# Allegro board IRCAM-27.brd
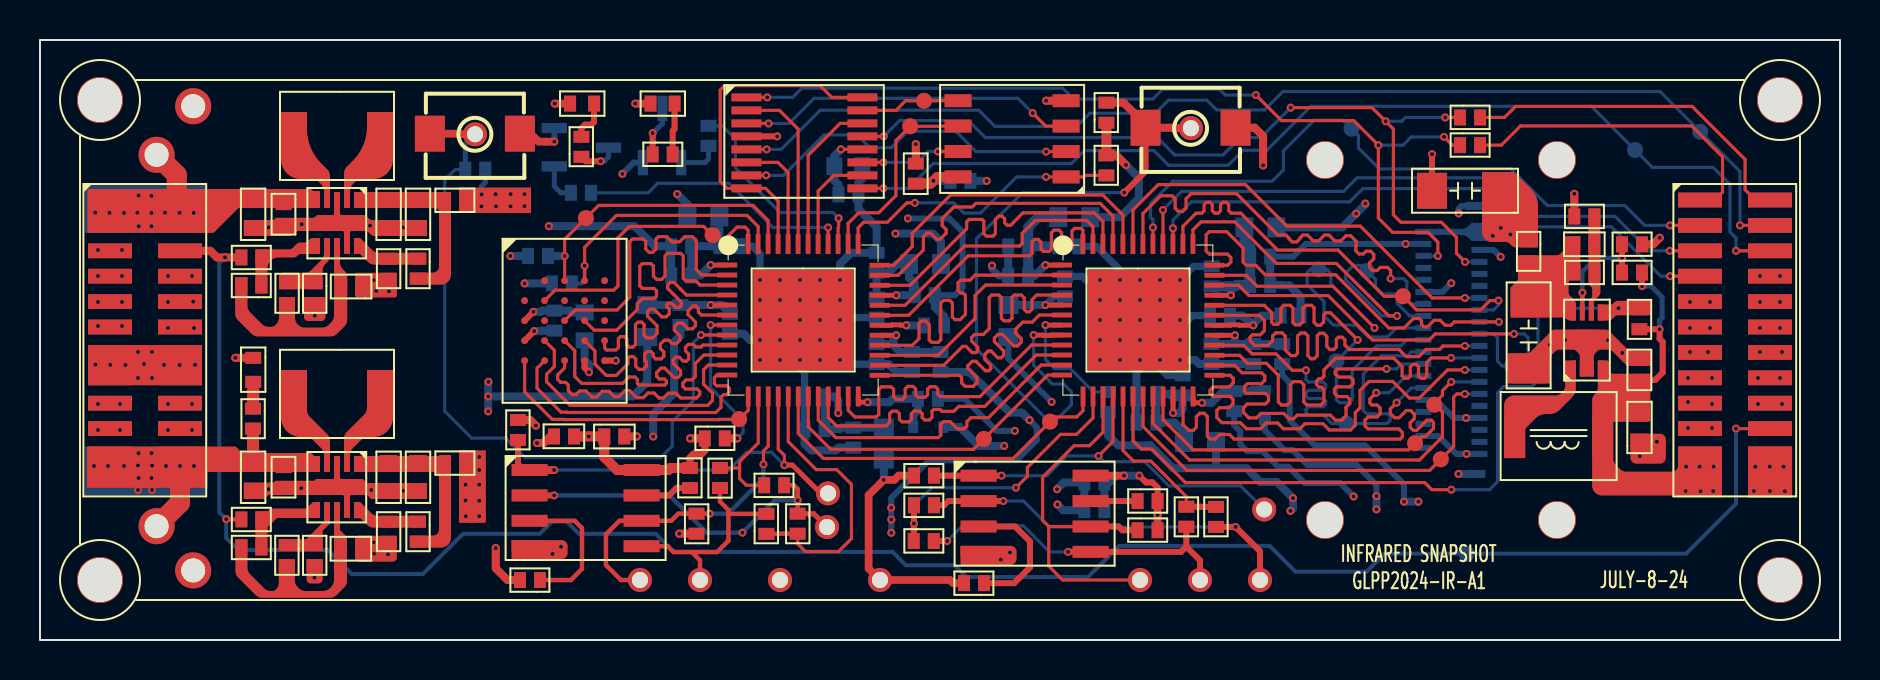
[diagram p0: board, top side]
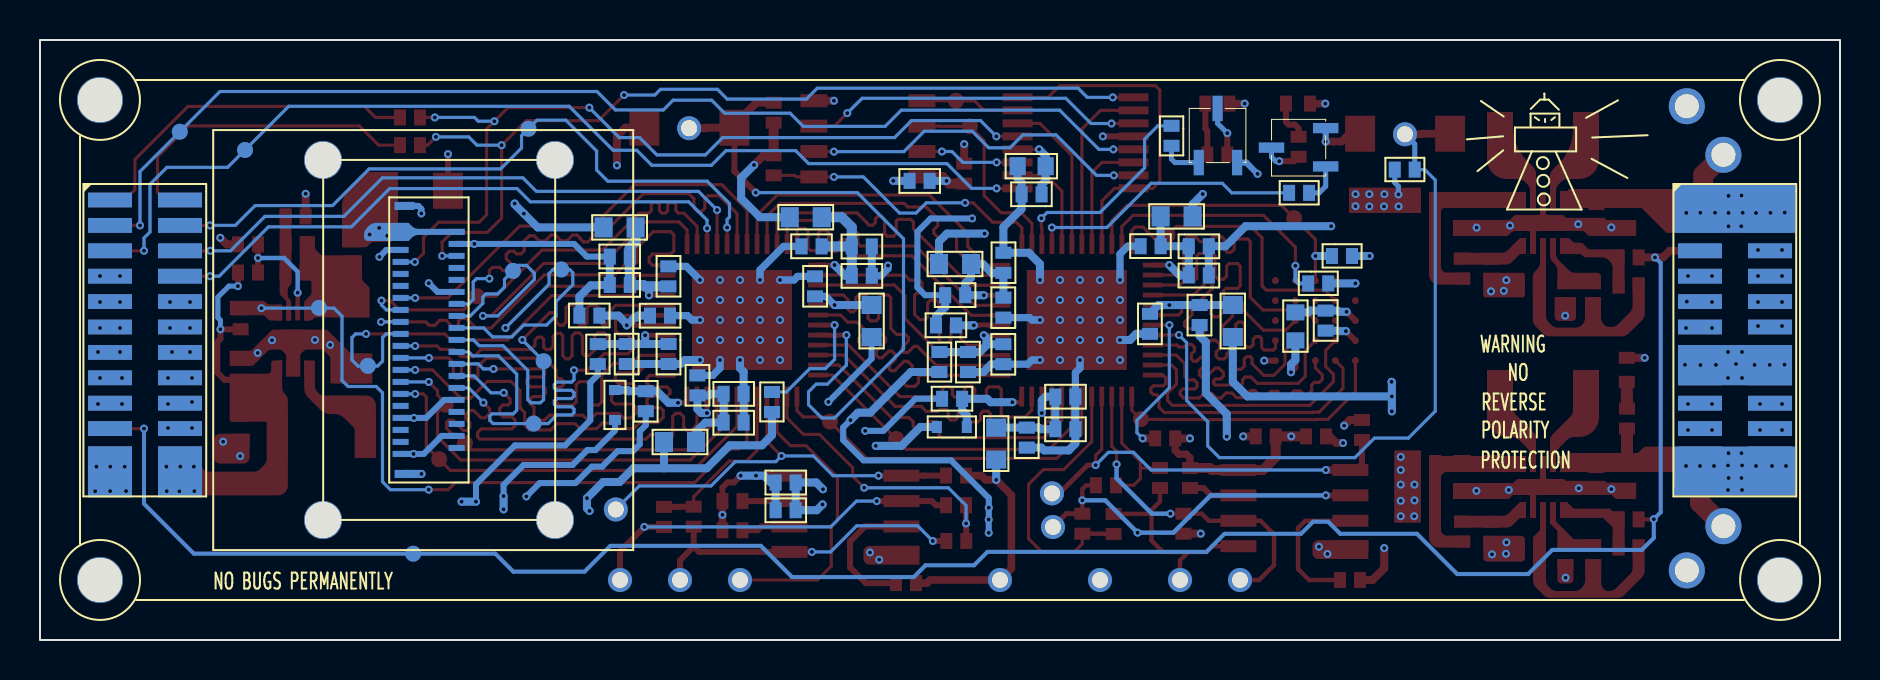
[diagram p1: board, bottom side, seen from below]

Outline 90 x 30 mm; copper layers: TOP, GND, VCC, BOTTOM. Coordinates in mm from the lower left corner of the outline.
Outline path: rectangle 0,0 90,30

## Design rules (mm)
constraint set DEFAULT: min track width 0.157
net group N101011: nets N101011 N101135
net group MG1: nets PSRAM_ADQ0 PSRAM_ADQ1 PSRAM_ADQ2 PSRAM_ADQ3 PSRAM_ADQ4 PSRAM_ADQ5 PSRAM_ADQ6 PSRAM_ADQ7 PSRAM_CLK PSRAM_DQS
net group MG2: nets IR_D0 IR_D1 IR_D2 IR_D3 IR_D4 IR_D5 IR_D6 IR_D7 IR_D8 IR_D9 IR_D10 IR_D11 IR_D12 IR_D13 IR_HSYNC IR_PCLK IR_VSYNC
net group MG3: nets RAM_ADQ0 RAM_ADQ1 RAM_ADQ2 RAM_ADQ3 RAM_ADQ4 RAM_ADQ5 RAM_ADQ6 RAM_ADQ7 RAM_CLK RAM_DQS

## Placement (name value [footprint] x y rotation side)
C1  22uF  [C1206]  74.43 16.88 270 top
C2  22uF  [C1206]  72.9 22.46 180 top
C3  33pF  [C0402]  76.71 19.79 0 top
C4  0.1uF  [C0402]  79.97 14.01 270 top
C5  10uF  [C0603]  10.65 22 270 top
C6  0.1uF  [C0402]  12.18 21.8 270 top
C7  10uF  [C0603]  17.43 22 270 top
C8  10uF  [C0603]  18.9 22 270 top
C9  10uF  [C0603]  79.97 9.91 90 top
C10  0.1uF  [C0402]  16.06 17.67 180 top
C11  1uF  [C0402]  26.7 10.18 180 top
C12  0.1uF  [C0402]  28.21 10.18 0 top
C13  10uF  [C0603]  10.65 8.85 270 top
C14  0.1uF  [C0402]  12.18 8.64 270 top
C15  10uF  [C0603]  17.43 8.85 270 top
C16  10uF  [C0603]  18.9 8.85 270 top
C17  0.1uF  [C0402]  16.05 4.56 180 top
C18  0.1uF  [C0402]  39.92 22.28 0 bottom
C19  10uF  [C0603]  39.72 23.69 0 bottom
C20  0.1uF  [C0402]  33.97 19.69 0 bottom
C21  10nF  [C0402]  32.56 19.69 180 bottom
C22  10nF  [C0402]  50.92 19.68 0 bottom
C23  1uF  [C0402]  49.41 19.68 180 bottom
C24  1uF  [C0402]  60.51 19.17 0 bottom
C25  1uF  [C0402]  41.83 18.36 90 bottom
C26  1uF  [C0402]  32.56 18.23 180 bottom
C27  0.1uF  [C0402]  49.41 18.21 180 bottom
C28  10nF  [C0402]  58.58 17.68 90 bottom
C29  0.1uF  [C0402]  60.51 17.75 0 bottom
C30  1uF  [C0402]  51.25 17.18 90 bottom
C31  0.1uF  [C0402]  43.74 17.24 0 bottom
C32  10nF  [C0402]  41.83 17.12 270 bottom
C33  10nF  [C0402]  32.02 16.75 270 bottom
C34  10nF  [C0402]  62.03 16.22 0 bottom
C35  0.1uF  [C0402]  59.5 16.22 180 bottom
C36  0.1uF  [C0402]  25.72 15.47 90 bottom
C37  1uF  [C0402]  34.5 16.31 270 bottom
C38  0.1uF  [C0402]  44.2 15.73 0 bottom
C39  10uF  [C0603]  27.23 14.98 90 bottom
C40  0.1uF  [C0402]  60.66 14.8 270 bottom
C41  10nF  [C0402]  58.57 14.8 270 bottom
C42  10nF  [C0402]  41.83 14.79 270 bottom
C43  0.1uF  [C0402]  43.6 14.4 270 bottom
C44  10nF  [C0402]  57.13 12.23 90 bottom
C45  0.1uF  [C0402]  55.82 12.31 180 bottom
C46  1uF  [C0402]  39.23 12.17 180 bottom
C47  0.1uF  [C0402]  43.9 12.06 0 bottom
C48  0.1uF  [C0402]  59.71 12.44 270 bottom
C49  1uF  [C0402]  55.82 10.87 180 bottom
C50  10nF  [C0402]  39.23 10.54 180 bottom
C51  0.1uF  [C0402]  40.66 10.62 270 bottom
C52  0.1uF  [C0402]  53.22 7.88 180 bottom
C53  1uF  [C0402]  53.22 6.49 180 bottom
C54  0.1uF  [C0402]  46.52 22.96 180 bottom
C55  1uF  [C0402]  43.79 23.82 270 top
D7  LED  [LED0402]  10.66 14.11 270 top
D8  1N4148WT-7  [SOD-523]  61.25 12.5 270 bottom
D9  1N4148WT-7  [SOD-523]  43.66 10.65 0 bottom
D10  LED  [LED0402]  31.73 26.82 180 top
D11  LED  [LED0402]  27.7 26.82 180 top
FB1  BLM18PG121SN1D  [L0603]  32.37 21.18 0 bottom
FB2  BLM18PG121SN1D  [L0603]  50.91 21.14 0 bottom
FB3  BLM18PG121SN1D  [L0603]  60.22 20.63 0 bottom
FB4  BLM18PG121SN1D  [L0603]  43.45 18.8 0 bottom
FB5  BLM18PG121SN1D  [L0603]  48.42 16.75 270 bottom
FB6  BLM18PG121SN1D  [L0603]  30.36 16.75 270 bottom
FB7  BLM18PG121SN1D  [L0603]  58.8 9.9 180 bottom
FB8  BLM18PG121SN1D  [L0603]  42.19 9.02 90 bottom
J1  CONN-24P  [SMD_CONN_2X12P_1D27]  7 22 270 top
J2  CONN-24P  [SMD_CONN_2X12P_1D27]  86.5 22 270 top
J3  HiroseFPC  [FH35C-39S-0D3SHW]  71.97 15 270 bottom
J4  CONN-24P  [SMD_CONN_2X12P_1D27]  3.5 22 270 bottom
J5  CONN-24P  [SMD_CONN_2X12P_1D27]  83 22 270 bottom
L1  FXL0420-1R5-M-1.5uH  [SMD_IND_2P_W4D4_L4D2_H1D8]  12.75 25.2 0 top
L2  4.7uH/1A  [IND_SMD_4D4X4D2]  78.13 10.2 180 top
L3  FXL0420-1R5-M-1.5uH  [SMD_IND_2P_W4D4_L4D2_H1D8]  12.75 12.3 0 top
NOREF  -  [unnamed]  87 27 0 top
NOREF#2  -  [#2]  0 0 90 top
NOREF#3  -  [unnamed#2]  75.85 24 0 top
NOREF#4  -  [#2]  3 3 0 top
NOREF#5  -  [#2]  0 30 0 top
NOREF#6  -  [unnamed#2]  75.85 6 0 top
NOREF#7  -  [unnamed#2]  64.25 24 0 top
NOREF#8  -  [unnamed]  87 3 0 top
NOREF#9  -  [#2]  87.71 27.84 0 top
NOREF#10  -  [unnamed]  3 27 0 top
NOREF#11  -  [#2]  87 3 90 top
NOREF#12  -  [unnamed]  3 3 0 top
NOREF#13  -  [unnamed#2]  64.25 6 0 top
Q1  MMBT2222ALT1G  [SOT-23-3]  32.54 23.44 180 bottom
Q2  MMBT2222ALT1G  [SOT-23-3]  25.28 23.2 90 bottom
R3  1M  [R0402]  77.73 18.38 180 top
R4  309K  [R0402]  76.72 21.18 0 top
R5  10K  [R0402]  53.32 23.23 90 top
R6  DNI  [R0402]  79.1 18.37 0 top
R7  DNP  [R0402]  21.25 21.99 180 top
R8  0R  [R0402]  79.1 19.79 0 top
R9  DNI  [R0402]  79.97 16.54 270 top
R10  DNP  [R0402]  74.43 19.94 270 top
R11  DNP  [R0402]  11.07 19.13 180 top
R12  205K  [R0402]  17.43 18.06 90 top
R13  536K  [R0402]  18.89 19.07 270 top
R14  0  [R0402]  11.07 17.73 180 top
R15  0  [R0402]  12.35 17.84 270 top
R16  DNP  [R0402]  13.73 17.84 270 top
R17  0  [R0402]  10.65 11.57 270 top
R18  10K  [R0402]  23.9 10 90 top
R19  2.2K  [R0402]  33.24 10.08 0 top
R20  DNP  [R0402]  21.25 8.85 180 top
R21  10K  [R0402]  44.7 8.22 180 top
R22  10K  [R0402]  32.5 7.6 90 top
R23  0R  [R0402]  34 8.6 270 top
R24  DNI  [R0402]  37.21 7.74 180 top
R25  10K  [R0402]  54.88 6.95 0 top
R26  DNI  [R0402]  44.7 6.74 180 top
R27  DNI  [R0402]  57.31 6.66 270 top
R28  0R  [R0402]  58.8 5.65 90 top
R29  DNP  [R0402]  11.07 6.03 180 top
R30  10K  [R0402]  32.83 6.32 270 top
R31  DNI  [R0402]  36.32 5.31 90 top
R32  0R  [R0402]  37.88 6.32 270 top
R33  10K  [R0402]  54.88 5.49 0 top
R34  200K  [R0402]  17.43 4.91 90 top
R35  280K  [R0402]  18.89 5.92 270 top
R36  0R  [R0402]  43.69 4.95 0 top
R37  0  [R0402]  11.07 4.63 180 top
R38  0  [R0402]  12.34 4.74 270 top
R39  DNP  [R0402]  13.73 4.74 270 top
R40  10K  [R0402]  25 3 180 top
R41  10K  [R0402]  47.2 2.84 180 top
R42  10K  [R0402]  53.32 25.87 90 top
R43  10K  [R0402]  22.26 23.52 180 bottom
R44  4.7K  [R0402]  25.4 19.2 180 bottom
R45  4.7K  [R0402]  26.59 17.83 180 bottom
R46  100R  [R0402]  62.11 14.79 270 bottom
R47  100R  [R0402]  45.03 14.4 270 bottom
R48  2.2K  [R0402]  53.4 11.4 90 bottom
R49  DNP  [R0402]  71 24.74 0 top
R50  DNP  [R0402]  71 26.13 0 top
R51  2K  [R0402]  30.64 24.28 0 top
R52  2K  [R0402]  27.07 24.16 90 top
R53  200  [R0402]  33.43 25.71 270 bottom
R54  200  [R0402]  27.55 22.36 180 bottom
SW1  SW KEY-SPST  [SW_SMD_2P_L3D9_W3D0_P4D5]  19.5 25.32 0 top
SW2  SW KEY-SPST  [SW_SMD_2P_L3D9_W3D0_P4D5]  55.28 25.61 0 top
TP1  T POINT R  [TP_THR_1D8_1D2]  7.66 26.69 0 top
TP2  T POINT R  [TP_THR_1D8_1D2]  5.83 24.26 0 top
TP3  T POINT R  [TP_THR_CIR_0D8_1D2]  57.55 25.59 180 bottom
TP4  T POINT R  [TP_THR_CIR_0D8_1D2]  21.75 25.29 180 bottom
TP5  T POINT R  [TP_THR_1D8_1D2]  5.83 5.69 0 top
TP6  T POINT R  [TP_THR_1D8_1D2]  7.66 3.48 0 top
TP7  T POINT R  [TP_THR_CIR_0D8_1D2]  30 3 0 top
TP8  T POINT R  [TP_THR_CIR_0D8_1D2]  33 3 0 top
TP9  T POINT R  [TP_THR_CIR_0D8_1D2]  39.35 5.65 0 top
TP10  T POINT R  [TP_THR_CIR_0D8_1D2]  39.4 7.33 0 top
TP11  T POINT R  [TP_THR_CIR_0D8_1D2]  42 3 0 top
TP12  T POINT R  [TP_THR_CIR_0D8_1D2]  55 3 0 top
TP13  T POINT R  [TP_THR_CIR_0D8_1D2]  58 3 0 top
TP14  T POINT R  [TP_THR_CIR_0D8_1D2]  61 3 0 top
TP15  T POINT R  [TP_THR_CIR_0D8_1D2]  61.21 6.53 0 top
TP16  T POINT R  [TP_THR_CIR_0D8_1D2]  37 3 0 top
TP17  T POINT A  [TP_SMD_CIR_0D8_NP]  64.82 13.94 180 bottom
TP18  T POINT A  [TP_SMD_CIR_0D8_NP]  65.32 10.82 180 bottom
TP19  T POINT A  [TP_SMD_CIR_0D8_NP]  63.94 18.53 180 bottom
TP20  T POINT A  [TP_SMD_CIR_0D8_NP]  66.35 18.45 180 bottom
TP21  T POINT A  [TP_SMD_CIR_0D8_NP]  73.61 13.71 180 bottom
TP22  T POINT A  [TP_SMD_CIR_0D8_NP]  76.05 16.61 180 bottom
TP23  T POINT A  [TP_SMD_CIR_0D8_NP]  71.34 4.31 180 bottom
TP24  T POINT A  [TP_SMD_CIR_0D8_NP]  83.01 25.41 180 bottom
TP25  T POINT A  [TP_SMD_CIR_0D8_NP]  79.75 24.5 180 bottom
TP26  T POINT A  [TP_SMD_CIR_0D8_NP]  65.58 25.56 180 bottom
TP27  T POINT A  [TP_SMD_CIR_0D8_NP]  70.04 9.04 0 top
TP28  T POINT A  [TP_SMD_CIR_0D8_NP]  68.15 17.19 0 top
TP29  T POINT A  [TP_SMD_CIR_0D8_NP]  69.71 11.76 0 top
TP30  T POINT A  [TP_SMD_CIR_0D8_NP]  68.75 9.84 0 top
TP31  T POINT A  [TP_SMD_CIR_0D8_NP]  33.63 20.25 0 top
TP32  T POINT A  [TP_SMD_CIR_0D8_NP]  27.29 21.09 0 top
TP33  T POINT A  [TP_SMD_CIR_0D8_NP]  34.96 11.04 0 top
TP34  T POINT A  [TP_SMD_CIR_0D8_NP]  43.51 25.69 0 top
TP35  T POINT A  [TP_SMD_CIR_0D8_NP]  44.2 26.96 0 top
TP36  T POINT A  [TP_SMD_CIR_0D8_NP]  50.5 10.92 0 top
TP37  T POINT A  [TP_SMD_CIR_0D8_NP]  47.19 10.05 0 top
U1  M95P32-IXMNT/E  [SO8N]  45.91 23.15 90 top
U2  LTC3539EDCB-2#TRPBF  [DFN-8]  76.67 16.38 0 top
U3  TPS63030DSKR  [VSON-10]  14.85 20.85 270 top
U4  APS25608N-OBR-BD  [BGA-24]  24.23 17.97 0 top
U5  iCE40UP5K- SG48  [QFN-48]  38.16 16 0 top
U6  iCE40UP5K- SG48  [QFN-48]  54.9 16 0 top
U7  TPS63030DSKR  [VSON-10]  14.85 7.65 270 top
U8  W25Q64JW  [SOIC-8]  24.48 8.5 0 top
U9  W25Q64JW  [SOIC-8]  46.93 8.22 0 top
U10  TS3A44159PWR  [TSSOP-16]  38.19 24.21 0 top

## Library data of the parts
C1 C2 = CAP NP: signal model: DEFAULT_CAPACITOR_2.2e+07pF_2_1
C3 = CAP NP: signal model: DEFAULT_CAPACITOR_33.000000pF_2_1
C4 C9 = CAP NP: signal model: DEFAULT_CAPACITOR_1e+07pF_2_1
C5-C8 C10-C55 = CAP NP
D7 D10 D11 = LED
D8 D9 = DIODE
FB1-FB8 L1 L3 = INDUCTOR
J1 J2 J4 J5 = CONN-24P
J3 = HiroseFPC_0
L2 = INDUCTOR: signal model: DEFAULT_INDUCTOR_4700nH_2_1
Q1 Q2 = MMBT2222AL
R3 = R: signal model: DEFAULT_RESISTOR_0.001OHM_2_1
R4 = R: signal model: DEFAULT_RESISTOR_562000OHM_2_1
R5 R7 R10-R54 = R
R6 R8 R9 = R: signal model: DEFAULT_RESISTOR_10000OHM_2_1
SW1 SW2 = SW KEY-SPST
TP1-TP16 = T POINT R
TP17-TP37 = T POINT A
U1 = M95P32-I
U2 = LTC3539EDCB#PBF
U3 U7 = TPS63030DSKR
U4 = APS25608N-OBR-BD_2
U5 U6 = iCE40UP5K- SG48
U8 U9 = W25Q64JW
U10 = TS3A44159PWR

## Footprints (pads in the part's own frame, mm; a bottom-side part is the same pattern mirrored in y, then rotated)
BGA-24
  round 0.35 smd: A2(1,0) A3(2,0) A4(3,0) A5(4,0) B1(0,-1) B2(1,-1) B3(2,-1) B4(3,-1) B5(4,-1) C1(0,-2) C2(1,-2) C3(2,-2) C4(3,-2) C5(4,-2) D1(0,-3) D2(1,-3) D3(2,-3) D4(3,-3) D5(4,-3) E1(0,-4) E2(1,-4) E3(2,-4) E4(3,-4) E5(4,-4)
C0402
  rect 0.6x0.8 smd: 1(0,0) 2(1,0)
C0603
  rect 0.8x0.9 smd: 1(0,0) 2(1.4,0)
C1206
  rect 1.5x1.8 smd: 1(0,0) 2(3.3,0)
DFN-8
  rect 0.25x0.8 smd: 1(0,-2.8) 2(0.45,-2.8) 3(0.9,-2.8) 4(1.35,-2.8) 5(1.35,0) 6(0.9,0) 7(0.45,0) 8(0,0)
  rect 1.2x1 smd: 9(0.676,-1.355)
FH35C-39S-0D3SHW
  rect 0.3x0.8 smd: 1(-5.7,0) 2(-5.4,2.8) 3(-5.1,0) 4(-4.8,2.8) 5(-4.5,0) 6(-4.2,2.8) 7(-3.9,0) 8(-3.6,2.8) 9(-3.3,0) 10(-3,2.8) 11(-2.7,0) 12(-2.4,2.8) 13(-2.1,0) 14(-1.8,2.8) 15(-1.5,0) 16(-1.2,2.8) 17(-0.9,0) 18(-0.6,2.8) 19(-0.3,0) 20(0,2.8) 21(0.3,0) 22(0.6,2.8) 23(0.9,0) 24(1.2,2.8) 25(1.5,0) 26(1.8,2.8) 27(2.1,0) 28(2.4,2.8) 29(2.7,0) 30(3,2.8) 31(3.3,0) 32(3.6,2.8) 33(3.9,0) 34(4.2,2.8) 35(4.5,0) 36(4.8,2.8) 37(5.1,0) 38(5.4,2.8) 39(5.7,0)
  rect 0.4x1 smd: 40(6.7,0.2) 41(-6.7,0.2)
IND_SMD_4D4X4D2
  rect 1.05x2.2 smd: 1(0,0) 2(4.4,0)
L0603
  rect 0.9x1 smd: 1(0,0) 2(1.6,0)
LED0402
  rect 0.6x0.8 smd: 1(0,0) 2(1.2,0)
QFN-48
  rect 1x0.24 smd: 1(-3.801,2.748) 2(-3.801,2.248) 3(-3.801,1.748) 4(-3.801,1.248) 5(-3.801,0.748) 6(-3.801,0.248) 7(-3.801,-0.252) 8(-3.801,-0.752) 9(-3.801,-1.252) 10(-3.801,-1.752) 11(-3.801,-2.252) 12(-3.801,-2.752) 25(3.822,-2.764) 26(3.822,-2.264) 27(3.822,-1.764) 28(3.822,-1.264) 29(3.822,-0.764) 30(3.822,-0.264) 31(3.822,0.236) 32(3.822,0.736) 33(3.822,1.236) 34(3.822,1.736) 35(3.822,2.236) 36(3.822,2.736)
  rect 0.24x1 smd: 13(-2.748,-3.826) 14(-2.248,-3.826) 15(-1.748,-3.826) 16(-1.248,-3.826) 17(-0.748,-3.826) 18(-0.248,-3.826) 19(0.252,-3.826) 20(0.752,-3.826) 21(1.252,-3.826) 22(1.752,-3.826) 23(2.252,-3.826) 24(2.752,-3.826) 37(2.746,3.797) 38(2.246,3.797) 39(1.746,3.797) 40(1.246,3.797) 41(0.746,3.797) 42(0.246,3.797) 43(-0.254,3.797) 44(-0.754,3.797) 45(-1.254,3.797) 46(-1.754,3.797) 47(-2.254,3.797) 48(-2.754,3.797)
  rect 5x5 smd: 49(0,0)
R0402
  rect 0.6x0.8 smd: 1(0,0) 2(1,0)
SMD_CONN_2X12P_1D27
  rect 0.74x2.2 smd: 1(0,-3.5) 2(1.27,-3.5) 3(2.54,-3.5) 4(3.81,-3.5) 5(5.08,-3.5) 6(6.35,-3.5) 7(7.62,-3.5) 8(8.89,-3.5) 9(10.16,-3.5) 10(11.43,-3.5) 11(12.7,-3.5) 12(13.97,-3.5) 13(13.97,0) 14(12.7,0) 15(11.43,0) 16(10.16,0) 17(8.89,0) 18(7.62,0) 19(6.35,0) 20(5.08,0) 21(3.81,0) 22(2.54,0) 23(1.27,0) 24(0,0)
SMD_IND_2P_W4D4_L4D2_H1D8
  rect 1.2x2.4 smd: 1(0,0) 2(4.2,0)
SO8N
  rect 0.65x1.35 smd: 1(0,-5.4) 2(1.27,-5.4) 3(2.54,-5.4) 4(3.81,-5.4) 5(3.81,0) 6(2.54,0) 7(1.27,0) 8(0,0)
SOD-523
  rect 0.5x0.6 smd: 1(0,0) 2(1.5,0)
SOIC-8
  rect 1.8x0.6 smd: 1(0,0) 2(0,-1.27) 3(0,-2.54) 4(0,-3.81) 5(5.6,-3.81) 6(5.6,-2.54) 7(5.6,-1.27) 8(5.6,0)
SOT-23-3
  rect 0.51x1.27 smd: 1(0.476,0.434) 2(2.391,0.434) 3(1.415,3.142)
SW_SMD_2P_L3D9_W3D0_P4D5
  rect 1.5x1.8 smd: 1(0,0) 2(4.5,0)
TP_SMD_CIR_0D8_NP
  round 0.8 smd: 1(0,0)
TP_THR_1D8_1D2
  round 1.8 hole 1.2: 1(0,0)
TP_THR_CIR_0D8_1D2
  round 1.2 hole 0.8: 1(0,0)
TSSOP-16
  rect 1.5x0.4 smd: 1(-2.872,2.924) 2(-2.872,2.274) 3(-2.872,1.624) 4(-2.872,0.974) 5(-2.872,0.324) 6(-2.872,-0.326) 7(-2.872,-0.976) 8(-2.872,-1.626) 9(2.928,-1.626) 10(2.928,-0.976) 11(2.928,-0.326) 12(2.928,0.324) 13(2.928,0.974) 14(2.928,1.624) 15(2.928,2.274) 16(2.928,2.924)
unnamed
  round 2.3 hole 2.2 unplated: (0,0)
unnamed#2
  round 1.9 hole 1.8 unplated: (0,0)
VSON-10
  rect 0.8x0.3 smd: 1(-1.15,1) 2(-1.15,0.5) 3(-1.15,0) 4(-1.15,-0.5) 5(-1.15,-1) 6(1.15,-1) 7(1.15,-0.5) 8(1.15,0) 9(1.15,0.5) 10(1.15,1)
  rect 0.8x2 smd: 11(0,0)

## Nets
1VCC: C33.1 C37.1 C38.1 FB6.1 U5.5 U5.30
1VCCIO_0: C25.1 C31.1 C32.1 FB4.1 U5.33
1VCCIO_2: C20.1 C21.1 C26.1 FB1.2 U5.1
2VCC: C30.1 C34.1 C35.1 FB5.1 U6.5 U6.30
2VCCIO_0: C24.1 C28.1 C29.1 FB3.1 U6.33
2VCCIO_2: C22.1 C23.1 C27.1 FB2.1 U6.1
GND: C1.2 C2.2 C4.1 C5.2 C6.2 C7.2 C8.2 C9.1 C10.1 C11.2 C12.2 C13.2 C14.2 C15.2 C16.2 C17.1 C18.2 C19.2 C20.2 C21.2 C22.2 C23.2 C24.2 C25.2 C26.2 C27.2 C28.2 C29.2 C30.2 C31.2 C32.2 C33.2 C34.2 C35.2 C36.2 C37.2 C38.2 C39.2 C40.2 C41.2 C42.2 C43.2 C44.2 C45.2 C46.2 C47.2 C48.2 C49.2 C50.2 C51.2 C52.2 C53.2 C54.1 C55.1 D7.1(CATHODE) J1.7 J1.8 J1.17 J1.18 J2.13 J2.14 J3.4 J3.5 J3.12 J3.30 J3.33 J3.36 J3.39 J3.40 J3.41 J4.7 J4.8 J4.17 J4.18 J5.11 J5.12 Q1.2(EMITTER) Q2.2(EMITTER) R4.1 R8.2 R12.1 R16.2 R34.1 R39.2 SW1.2 SW2.2 TP1.1(TP) TP6.1(TP) TP16.1(TP) U1.4 U2.2 U2.3 U2.9 U3.3 U3.9 U3.11 U4.C1 U4.E5(VSS#E5) U5.49 U6.49 U7.3 U7.9 U7.11 U8.4 U9.4 U10.4
P1V2: FB5.2 FB6.2 R20.1 R46.2 R47.2
P1V8: C11.1 C12.1 C18.1 C19.1 C36.1 C39.1 C52.1 C53.1 C54.2 C55.2 FB1.1 FB2.2 FB3.2 FB4.2 FB7.1 FB8.1 R5.2 R7.1 R18.2 R19.1 R21.2 R22.2 R25.2 R30.2 R33.2 R40.2 R41.2 R42.1 R43.1 R44.2 R45.2 R48.1 TP11.1(TP) U1.8 U4.D1 U4.E4 U8.8 U9.8 U10.12(VCC)
P3V3: C4.2 C5.1 C6.1 C9.2 C13.1 C14.1 D8.2 D9.2 D10.2 D11.2 J1.1 J1.2 J1.11 J1.12 J1.13 J1.14 J1.23 J1.24 J2.11 J2.12 J4.1 J4.2 J4.11 J4.12 J4.13 J4.14 J4.23 J4.24 J5.13 J5.14 L2.1 R6.2 R9.2 R17.2 TP2.1(TP) TP5.1(TP) U2.4 U3.5 U7.5
1SPI_VCCIO1: C46.1 C50.1 C51.1 FB8.2 U5.22
2SPI_VCCIO1: C44.1 C45.1 C49.1 FB7.2 U6.22
ALL_SHUTDOWN: J1.22 J2.15 R11.2 R29.2 TP23.1(TP)
CFG_SPI_CLK: TP34.1(TP) U1.6 U5.38
CFG_SPI_CS: R5.1 U1.1 U5.37
CFG_SPI_D0: TP35.1(TP) U1.5 U10.15
CFG_SPI_D1: U1.2 U10.7
CFG_SPI_D2: U1.3(W\-DQ2) U10.3
CFG_SPI_D3: U1.7 U10.11
DB_IO_0: U5.42 U10.14
DB_IO_1: U5.43 U10.2
DB_IO_2: U5.44 U10.6
DB_IO_3: U5.41 U10.10
DONE1_LED: R19.2 U5.7
DONE2_LED: R48.2 U6.7
FF1_SCK: R30.1 TP7.1(TP) U5.15 U8.6
FF1_SS: R18.1 TP10.1(TP) U5.16 U8.1
FF2_SCK: R33.1 TP12.1(TP) U6.15 U9.6
FF2_SS: R21.1 TP15.1(TP) U6.16 U9.1
FL1_MISO: R24.1 R32.1 TP9.1(TP) U8.2
FL1_MOSI: R23.2 R31.2 TP8.1(TP) U8.5
FL1_RST: R22.1 U8.7
FL1_WP: R40.1 U8.3(W\P\(IO2))
FL2_MISO: R26.1 R28.1 TP14.1(TP) U9.2
FL2_MOSI: R27.2 R36.2 TP13.1(TP) U9.5
FL2_RST: R25.1 U9.7
FL2_WP: R41.1 U9.3(W\P\(IO2))
FP1_RST: R43.2 SW1.1 TP4.1(TP) U5.8
FP1_SI: R31.1 R32.2 U5.17
FP1_SO: R23.1 R24.2 U5.14
FP2_RST: R42.2 SW2.1 TP3.1(TP) U6.8
FP2_SI: R27.1 R28.2 U6.17
FP2_SO: R26.2 R36.1 U6.14
IO_MUX: U5.45 U10.8 U10.16
IR_5V0: C2.1 J3.1 J3.2 J3.3(VDD50#3) R10.1
IR_D0: J3.13 U6.43
IR_D1: J3.14 U6.42
IR_D2: J3.15 TP28.1(TP) U6.38
IR_D3: J3.16 TP20.1(TP) U6.37
IR_D4: J3.17 U6.36
IR_D5: J3.18 TP19.1(TP) U6.35
IR_D6: J3.19 TP21.1(TP) U6.34
IR_D7: J3.20 TP17.1(TP) U6.32
IR_D8: J3.21 U6.31
IR_D9: J3.22 TP18.1(TP) U6.28
IR_D10: J3.23 U6.27
IR_D11: J3.24 U6.26
IR_D12: J3.25 U6.25
IR_D13: J3.26 U6.23
IR_HSYNC: J3.28 TP30.1(TP) U6.21
IR_PCLK: J3.29 TP27.1(TP) U6.19
IR_RESERVED1: J2.3 U6.40
IR_RESERVED2: J2.4 U6.39
IR_SHUTDOWN: R9.1 TP22.1(TP) U2.5 U6.18
IR_UART_RX: J3.6 R49.1 U10.1
IR_UART_TX: J3.7 R50.1 U10.13
IR_UPLD_DONE: J2.2 TP26.1(TP) U6.41
IR_VSYNC: J3.27 TP29.1(TP) U6.20
LED1: R53.1 U5.39
LED2: R54.1 U5.40
MCU_UART_RX: J2.24 R50.2
MCU_UART_TX: J2.1 R49.2
NC.A2: U4.A2
NC.A5: U4.A5
NC.B1: U4.B1
NC.B3: U4.B3
NC.B4: U4.B4
NC.B5: U4.B5
NC.C5: U4.C5
PSRAM_ADQ0: U4.D3 U5.9
PSRAM_ADQ1: U4.D2 U5.11
PSRAM_ADQ2: U4.C4 U5.3
PSRAM_ADQ3: U4.D4 U5.6
PSRAM_ADQ4: U4.D5 U5.4
PSRAM_ADQ5: U4.E3 U5.10
PSRAM_ADQ6: U4.E2 U5.12
PSRAM_ADQ7: TP33.1(TP) U4.E1 U5.13
PSRAM_CE: R44.1 TP32.1(TP) U4.A3 U5.46
PSRAM_CLK: TP31.1(TP) U4.B2 U5.48
PSRAM_DQS: U4.C3 U5.2
PSRAM_RST: R45.1 U4.A4 U5.47
RAM_ADQ0: U5.20 U6.11
RAM_ADQ1: U5.34 U6.46
RAM_ADQ2: U5.23 U6.9
RAM_ADQ3: U5.36 U6.44
RAM_ADQ4: U5.25 U6.6
RAM_ADQ5: U5.21 U6.10
RAM_ADQ6: U5.28 U6.2
RAM_ADQ7: U5.35 U6.45
RAM_CE: U5.32 U6.47
RAM_CLK: U5.31 U6.48
RAM_DQS: U5.26 U6.4
RAM_RST: U5.27 U6.3
RFU: U4.C2
SAMPLE_DONE: TP37.1(TP) U5.19 U6.12
SAMPLE_EN: TP36.1(TP) U5.18 U6.13
UN-USED-1: J1.3 J4.22
UN-USED-2: J1.4 J4.21
UN-USED-3: J1.5 J4.20
UN-USED-4: J1.6 J4.19
UN-USED-5: J1.9 J4.16
UN-USED-6: J1.10 J4.15
UN-USED-7: J1.15 J4.10
UN-USED-8: J1.16 J4.9
UN-USED-9: J1.19 J4.6
UN-USED-10: J1.20 J4.5
UN-USED-11: J1.21 J4.4
UNUSED-5: J2.5 J5.20
UNUSED-6: J2.6 J5.19
UNUSED-7: J2.7 J5.18
UNUSED-8: J2.8 J5.17
UNUSED-9: J2.9 J5.16
UNUSED-10: J2.10 J5.15
UNUSED-16: J2.16 J5.9
UNUSED-17: J2.17 J5.8
UNUSED-18: J2.18 J5.7
UNUSED-19: J2.19 J5.6
UNUSED-20: J2.20 J5.5
UNUSED-21: J2.21 J5.4
UPLD_UART_RX: J2.22 TP25.1(TP) U10.9
UPLD_UART_TX: J2.23 TP24.1(TP) U10.5
N14095: C40.1 C41.1 R46.1 U6.29
N14245: C48.1 D8.1(K) U6.24(VPP_2V5)
N100925: L2.2 U2.1
N101011: C1.1 C3.1 R3.2 R10.2 U2.8(VOUT)
N101135: C3.2 R3.1 R4.2 U2.6
N317892: R6.1 R8.1 U2.7
N469791: L1.1 U3.4
N469803: L1.2 U3.2
N471379: C10.2 R14.2 R15.2 U3.8
N472703: R12.2 R13.1 U3.10
N472718: C7.1 C8.1 R7.2 R13.2 U3.1(VOUT)
N476340: R11.1 R14.1 U3.6
N477844: R15.1 R16.1 U3.7
N481384: L3.1 U7.4
N481392: L3.2 U7.2
N481444: C15.1 C16.1 R20.2 R35.2 U7.1(VOUT)
N481654: C17.2 R37.2 R38.2 U7.8
N481662: R34.2 R35.1 U7.10
N481698: R29.1 R37.1 U7.6
N481730: R38.1 R39.1 U7.7
N596337: C42.1 C43.1 R47.1 U5.29
N596469: C47.1 D9.1(K) U5.24(VPP_2V5)
N671945: D7.2 R17.1
N733925: D10.1(CATHODE) R51.2
N734635: D11.1(CATHODE) R52.2
N735377: Q1.3 R51.1
N735641: Q2.3 R52.1
N735913: Q2.1 R54.2
N738842: Q1.1 R53.2

Pads without a net: J3 8 9 10 11 31 32 34 35 37 38; J4 3; J5 1 2 3 10 21 22 23 24

## Via types
v1: diameter 0.4, hole 0.2, TOP to BOTTOM, 352 vias

## Routing (per net, layer and track width the routed paths; a pad name or vN(x,y) marks a point on that pad's centre or on a via; arc(x,y) is an arc through that point)
1VCC: length 24.5
  TOP w0.24: 34.36,16.75 v1(33.53,16.75) ; v1(43.31,15.74) 43.04,15.74 43.02,15.76 42.59,15.76 42.57,15.74 U5.30
  VCC w0.4: v1(33.53,16.75) 33.96,16.75 34.55,16.16 34.55,13.79 35.31,13.04 43.95,13.04 44.53,13.62 44.53,15.1 43.9,15.74 v1(43.31,15.74)
  BOTTOM w0.4: FB6.1 C33.1 33.05,16.75 33.05,16.75 v1(33.53,16.75) 34.08,16.75 34.5,16.33 C37.1 ; v1(43.31,15.74) 43.35,15.74 43.36,15.73 C38.1
1VCCIO_0: length 6.5
  TOP w0.24: U5.33 v1(42.81,17.24)
  BOTTOM w0.4: C32.1 C25.1 42.42,18.36 42.86,18.8 FB4.1 43.45,18.11 43.58,17.98 43.59,17.98 43.74,17.83 C31.1 43.2,17.24 43.2,17.24 v1(42.81,17.24)
1VCCIO_2: length 6.4
  TOP w0.24: 34.36,18.75 v1(33.53,18.75)
  BOTTOM w0.4: FB1.2 C20.1 C21.1 C26.1 33.01,18.23 v1(33.53,18.75)
2VCC: length 23.4
  TOP w0.24: U6.5 v1(50.27,16.75) ; v1(60.66,15.74) 59.98,15.74 59.96,15.76 59.53,15.76 59.51,15.74 U6.30
  VCC w0.4: v1(50.27,16.75) 50.89,16.75 51.62,17.47 51.62,18.6 52.14,19.12 57.67,19.12 58.36,18.44 58.36,16.48 58.66,16.18 60.22,16.18 v1(60.66,15.74)
  BOTTOM w0.35: C30.1 50.7,17.18 v1(50.27,16.75)
  BOTTOM w0.4: C35.1 60.11,16.22 60.22,16.11 60.29,16.11 v1(60.66,15.74) 60.66,15.81 61.07,16.22 C34.1 ; FB5.1 49.88,16.75 49.88,16.75 v1(50.27,16.75)
2VCCIO_0: length 6.2
  TOP w0.24: U6.33 v1(59.55,17.24)
  BOTTOM w0.4: 59.55,17.68 v1(59.55,17.24)
  BOTTOM w0.5: FB3.1 60.22,19.92 60.51,19.63 C24.1 C29.1 59.83,17.75 59.76,17.68 59.36,17.68 59.36,17.68 C28.1
2VCCIO_2: length 7.6
  TOP w0.24: U6.1 v1(50.27,18.75)
  BOTTOM w0.4: C27.1 49.73,18.21 v1(50.27,18.75)
  BOTTOM w0.5: C22.1 C23.1 ; C23.1 49.41,20.64 49.91,21.14 FB2.1 ; C23.1 C27.1
GND: length 129.2
  TOP w0.3: C2.2 v1(69.6,24.29) ; U4.E5 v1(28.79,13.97) ; U10.4 v1(36.86,25.18) ; U4.C1 v1(24.67,16.41)
  TOP w0.38: v1(25.72,24.92) 25.31,24.92 25.31,24.92 24.93,24.92 24.54,25.32 SW1.2
  TOP w0.4: C12.2 v1(29.84,10.18) ; SW2.2 60.73,25.61 61.15,25.19 v1(61.15,23.73) ; U1.4 v1(50.3,26.96) ; v1(24.85,9.85) 25.19,9.85 25.52,10.18 C11.2 ; v1(80.99,20.11) 80.66,19.79 R8.2 ; D7.1 v1(9.77,14.11) ; C55.1 v1(43.79,24.79) ; R4.1 v1(76.72,22.31)
  BOTTOM w0.157: 52.22,6.59 C53.2
  BOTTOM w0.3: C48.2 59.71,10.74 60.01,10.44 60.01,9.79 60.35,9.44 61.12,9.44 61.89,8.67 62.41,8.67 63.23,7.85 65.01,7.85 v1(65.68,7.18) ; C47.2 46.23,12.06 47.83,10.46 v1(48.74,10.46) ; J3.39 v1(71.32,9.3) 70.82,9.3 69.92,10.2 J3.36 ; C31.2 45.74,17.24 46.13,17.63 46.13,20.41 45.46,21.08 v1(43.39,21.08) ; v1(70.93,21.33) 70.93,21.55 71.08,21.7 J3.41 ; J3.5 72.68,19.5 v1(73.03,19.15) ; v1(70.56,17.84) 70.12,17.4 J3.12 ; v1(29.12,23.31) 29.69,23.87 Q1.2 ; C24.2 62.66,19.17 63.29,19.8 v1(68.28,19.8) J3.4 ; J3.33 v1(71.3,11.1) 70.69,11.1 69.79,12 J3.30 ; Q2.2 v1(25.72,24.92)
  BOTTOM w0.35: v1(47.6,18.72) 47.6,18.56 47.95,18.21 C27.2
  BOTTOM w0.36: C46.2 38.23,13.36 38,13.59 v1(38,14) ; v1(40,16) 40.41,16 40.53,16.12 C32.2 ; C30.2 52.12,18.18 52.3,18 v1(53,18) ; v1(57,16) 57.41,16 57.63,16.22 C35.2 ; v1(57,18) 57.68,18.68 C28.2 ; C42.2 40.62,13.79 40.41,14 v1(40,14) ; C44.2 56.36,13.23 56,13.59 v1(56,14) ; C22.2 52.82,19.68 54,18.5 v1(54,18) ; C20.2 35.61,19.69 36,19.3 v1(36,18)
  BOTTOM w0.4: C26.2 C21.2 30.72,19.69 29.72,20.69 v1(25.44,20.69) ; v1(36,15) 35.5,15 35.19,15.31 C37.2 ; C46.2 C50.2 38.23,9.81 38.56,9.48 39.79,9.48 39.93,9.62 C51.2 ; v1(50.87,6.78) 51.16,6.49 52.12,6.49 52.22,6.59 C52.2 51.19,7.88 v1(50.85,7.54) ; C31.2 44.74,16.64 45.2,16.18 C38.2 ; v1(30.66,10.17) 30.66,11.3 31.71,12.34 31.71,14.9 32.02,15.21 C33.2 ; C19.2 41.12,23.07 40.92,22.87 C18.2 40.92,21.55 41.83,20.65 C25.2 40.56,19.36 40,18.8 v1(40,18) ; C23.2 C27.2 ; C42.2 42.42,13.79 42.45,13.76 42.46,13.76 42.82,13.4 C43.2 ; C34.2 63.03,17.17 62.46,17.73 62.03,17.73 62.02,17.75 C29.2 C24.2 ; C40.2 C41.2 57.96,13.8 57.76,14 v1(57,14) ; C49.2 C45.2 54.82,13.41 55,13.59 v1(55,14) ; J3.40 v1(70.93,8.3) ; C39.2 26.59,16.38 26.5,16.47 C36.2 25.12,16.47 25.06,16.41 v1(24.67,16.41) ; C54.1 v1(47.34,22.96)
  vias: v1(2.77,13.77) v1(3.51,13.75) v1(4.27,13.75) v1(4.9,14.4) v1(4.9,13.1) v1(5.2,13.8) v1(5.6,14.4) v1(5.6,13.1) v1(6.2,13.75) v1(6.98,13.75) v1(7.75,13.76) v1(11.43,20.63) v1(11.43,7.54) v1(13.09,20.79) v1(13.06,7.59) v1(13.74,16.21) v1(13.72,3.11) v1(16.5,20.72) v1(16.56,7.5) v1(16.69,17.99) v1(16.68,4.88) v1(16.7,4.31) v1(16.81,17.46) v1(17.45,17.43) v1(17.4,4.28) v1(18.17,20.62) v1(18.18,7.46) v1(25.63,4.3) v1(26.05,4.66) v1(36,17) v1(36,16) v1(36,14) v1(37,18) v1(37,17) v1(37,16) v1(37,15) v1(37,14) v1(38,18) v1(38,17) v1(38,16) v1(38,15) v1(39,18) v1(39,17) v1(39,16) v1(39,15) v1(39,14) v1(40,17) v1(40,15) v1(48.04,4.02) v1(48.5,4.38) v1(53,17) v1(53,16) v1(53,15) v1(53,14) v1(54,17) v1(54,16) v1(54,15) v1(54,14) v1(55,18) v1(55,17) v1(55,16) v1(55,15) v1(56,18) v1(56,17) v1(56,16) v1(56,15) v1(57,17) v1(57,15) v1(75.5,14.76) v1(76.25,15) v1(78.4,14.99) v1(79.11,14.35) v1(79.99,9.2) v1(80.84,9.91) v1(85.7,7.45) v1(85.76,8.66) v1(86.49,8.67) v1(86.5,7.45) v1(87.18,8.67) v1(87.24,7.44)
P1V2: length 57.7
  VCC w0.3: v1(21.96,6.96) 21.94,6.98 v1(21.28,6.98) ; v1(21.96,6.96) v1(21.96,7.77) ; v1(21.96,6.96) v1(21.96,6.19) v1(21.29,6.19) 21.29,7.35 21.28,7.36 v1(21.28,7.77) v1(21.96,7.77) ; v1(21.96,7.77) v1(21.96,8.5) v1(21.96,9.15) 21.96,10.99 v1(22.41,11.43) v1(22.41,12.18) 22.42,12.19 v1(22.42,12.91) ; v1(50.58,11.9) 50.24,11.57 ; 50.24,11.57 50.01,11.33 49.81,11.33 ; 50.24,11.57 50.05,11.57 49.81,11.33 ; 49.81,11.33 v1(49.48,10.99) ; v1(42.56,6.61) 42.56,6.03 v1(42.56,6.02)
  BOTTOM w0.3: FB5.2 48.42,14.06 v1(50.58,11.9) ; v1(68.2,6.92) 68.2,7.78 66.25,9.73 63.74,9.73 62.49,10.98 62.49,12.87 62.11,13.25 R46.2 ; v1(49.48,10.99) 49.84,10.63 49.84,10 48.83,8.98 44.45,8.98 42.56,7.1 v1(42.56,6.61) 42.56,6.03 v1(42.56,6.02) v1(42.56,5.36)
  BOTTOM w0.4: v1(68.92,6.92) v1(68.2,6.92) ; v1(22.42,12.91) 22.41,12.89 v1(22.41,12.18) ; v1(22.41,12.18) 29.63,12.18 30.36,12.91 FB6.2 ; v1(22.41,12.18) v1(22.41,11.43) ; R47.2 46.46,13.4 48.49,11.37 49.1,11.37 v1(49.48,10.99)
P1V8: length 180.8
  TOP w0.157: U10.12 v1(40.05,24.53)
  TOP w0.3: R25.2 55.88,7.62 55.62,7.88 55.3,7.88 v1(54.97,8.22) ; U4.D1 v1(24.71,15.44) ; U4.E4 27.23,13.61 v1(27.45,13.39)
  TOP w0.36: R19.1 33.24,9.47 33.06,9.3 32.69,9.3 32.5,9.11 R22.2
  TOP w0.38: R41.2 45.65,2.84 45.49,3 TP11.1 41.43,3.57 41.43,7.25 v1(42.19,8) 42.72,8 42.93,8.22 R21.2 ; U9.8 v1(54.2,8.22) ; R33.2 v1(55.88,6.26) R25.2
  TOP w0.4: R40.2 23.37,3 22.79,3.59 v1(22.79,4.6) ; v1(32.5,10.08) R19.1 ; v1(54.3,23.75) 53.82,24.23 R5.2 ; v1(24.79,10.72) 24.51,11 R18.2 ; R30.2 v1(31.96,5.32)
  TOP w0.5: C11.1 v1(27.44,10.18) C12.1 28.21,9.14 28.85,8.5 U8.8 31.42,8.5 31.52,8.6 R22.2 ; U1.8 44.87,23.15 v1(44.67,22.96) 44.53,22.82 C55.2 ; R42.1 R5.2
  VCC w0.3: v1(24.79,10.72) 24.79,11.12 24.84,11.17 24.84,12.74 ; v1(22.07,21.68) v1(22.8,21.68) ; v1(22.07,21.68) 22.07,19.5 22.74,18.83 ; v1(22.07,21.68) 22.08,21.69 v1(22.08,22.28) 23.73,22.28 23.75,22.29 v1(24.22,22.29) ; v1(22.8,21.68) 22.78,21.7 v1(22.78,22.29) ; v1(22.8,21.68) v1(23.53,21.68) ; v1(62.65,7.09) 62.65,7.94 62.37,8.22 v1(54.97,8.22) v1(54.2,8.22) 52.88,6.89 52.88,6.52 52.02,5.66 47.28,5.66 45.61,7.33 45.61,8.05 42.72,8.05 42.67,8 v1(42.19,8) 42.19,8.53 41.88,8.84 38.36,8.84 37.2,7.68 34.81,7.68 33.72,8.77 32.06,8.77 ; v1(23.53,22.29) v1(23.53,21.68) ; v1(23.53,21.68) 24.21,21.68 v1(24.22,21.69) v1(24.22,22.29) ; v1(31.86,22.3) 31.28,21.71 26.56,21.71 25.98,22.29 v1(24.22,22.29) ; 23.46,15.48 24.26,15.48 24.3,15.44 v1(24.71,15.44) ; 23.46,15.48 23.28,15.48 22.74,16.02 22.74,18.83 ; 23.46,15.48 23.46,14.12 24.84,12.74 ; 39.44,22.69 40.56,22.69 42.02,21.23 42.02,21.07 v1(42.77,20.32) 44.03,20.32 44.67,20.96 v1(44.67,22.96) ; v1(24.23,17.83) 23.74,17.83 22.74,18.83 ; 27.44,9.03 27.44,7.14 25.9,5.6 23.79,5.6 v1(22.79,4.6) ; 27.44,9.03 32.06,9.03 ; 27.44,9.03 v1(27.44,10.18) 27.44,10.59 27.43,10.6 27.43,11.3 26.8,11.93 26.8,12.74 ; 32.06,8.77 32.06,7.53 31.86,7.34 31.86,5.82 31.96,5.72 v1(31.96,5.32) ; 32.06,8.77 32.06,9.03 ; 32.06,9.03 32.5,9.47 v1(32.5,10.08) ; 22.74,18.83 23.15,18.83 v1(23.52,19.2) ; 24.84,12.74 26.8,12.74 ; v1(27.45,13.39) 26.8,12.74 ; v1(66.27,21.82) 65.81,21.36 v1(65.81,21.32)
  BOTTOM w0.25: R43.1 22.26,22.87 22.08,22.69 v1(22.08,22.28)
  BOTTOM w0.4: FB4.2 45.05,19.92 44.65,20.32 v1(42.77,20.32) ; 58.8,8.59 60.33,8.59 61.02,7.9 61.85,7.9 v1(62.65,7.09) 62.65,6.59 v1(62.52,6.45) ; 58.8,8.59 56.66,8.59 55.52,9.73 53.91,9.73 53.4,10.24 R48.1 ; 58.8,8.59 FB7.1 ; C39.1 27.23,14 27.45,13.78 v1(27.45,13.39) ; R44.2 v1(23.52,19.2) ; v1(66.27,21.82) 66.27,21.78 v1(65.81,21.32) 65.12,20.63 FB3.2 ; C36.1 25.12,15.47 25.1,15.44 v1(24.71,15.44) ; v1(54.97,8.22) v1(54.2,8.22) 53.8,8.22 53.46,7.88 C52.1 C53.1 ; C18.1 39.92,22.76 39.72,22.97 C19.1 39.72,24.2 v1(40.05,24.53) ; C54.2 v1(44.67,22.96) ; v1(54.3,23.75) 54.94,23.11 54.94,22.08 54,21.14 FB2.2 ; v1(31.86,22.3) 32.37,21.79 FB1.1 ; R45.2 v1(24.23,17.83) ; FB8.1 v1(42.19,8)
P3V3: length 196.3
  TOP w0.3: C4.2 80.77,13.01 81.14,13.37 81.14,14.9 80.98,15.06 v1(80.98,15.54) R9.2 ; v1(80.11,17.69) 80.11,17.78 80.1,17.78 R6.2
  TOP w0.38: D10.2 v1(29.77,26.82) ; D11.2 v1(25.74,26.82)
  TOP w0.5: 10.65,8.86 C13.1 ; 6.84,22.16 J1.24
  TOP w0.6: R17.2 10.65,8.86
  TOP w1: TP5.1 7,6.86 J1.13 ; 6.84,22.16 6.84,23.25 TP2.1
  VCC w0.3: v1(82.31,8.67) 83.27,8.67 v1(83.68,8.67) 83.68,7.87 83.66,7.85 v1(83.66,7.44) 83.26,7.44 83.25,7.45 v1(82.28,7.45) 82.28,7.85 82.31,7.87 v1(82.31,8.67) ; v1(82.31,8.67) 82.31,9.6 80.98,10.93 v1(80.98,15.54) 80.98,16.9 80.89,16.9 v1(80.11,17.69) 80.11,25.3 80.13,25.32 78.31,27.14 64.97,27.14 63.65,25.82 60.44,25.82 59.12,27.14 53.71,27.14 52.26,25.68 46.22,25.68 44.79,27.11 38.52,27.11 37.96,26.54 30.45,26.54 30.17,26.82 v1(29.77,26.82) v1(25.74,26.82) 25.43,27.13 13.68,27.13 10.81,24.26 TP2.1 5.83,22.87 5.57,22.61 v1(5.57,22.21) 5.57,21.36 v1(5.58,21.35) 5.58,20.69 v1(5.57,20.69) ; v1(82.31,8.67) 81.96,8.32 77.5,8.32 75.57,10.26 67.38,10.26 66.41,9.29 ; v1(48.21,9.71) 47.16,10.76 47.16,11.93 48.69,13.45 50.91,13.45 ; v1(4.94,20.69) 4.94,21.09 4.93,21.1 v1(4.93,22.22) ; v1(5.57,9.34) v1(5.57,8.1) 5.57,7.93 5.6,7.91 v1(5.6,7.5) 5.6,7.09 5.83,6.86 TP5.1 ; v1(4.9,7.5) 4.9,7.91 4.93,7.93 v1(4.93,8.1) v1(4.93,9.34) ; v1(83.03,7.44) 82.98,7.48 v1(82.98,8.67) ; 66.41,9.29 66.37,9.25 66.37,7.65 v1(66.82,7.2) ; 66.41,9.29 66.32,9.38 ; v1(2.76,21.37) 7.26,21.37 7.28,21.36 v1(7.69,21.36) 8.87,21.36 10.56,19.66 10.56,15.73 11.19,15.1 11.19,11.05 9.22,9.08 8.08,9.08 v1(7.7,8.7) v1(7,8.7) v1(6.3,8.7) v1(4.2,8.7) v1(3.4,8.7) v1(2.7,8.7)
  BOTTOM w0.25: v1(80.11,17.69) 80.56,17.69 81.11,17.14 81.11,16.12 80.98,15.99 v1(80.98,15.54)
  BOTTOM w0.3: v1(66.82,7.2) 66.82,7.75 65.82,8.75 63.37,8.75 62.63,9.5 62.23,9.5 61.25,10.47 D8.2
  BOTTOM w0.4: v1(66.82,7.2) v1(66.82,6.53) ; v1(48.21,9.71) 46.92,9.71 45.98,10.65 D9.2
  vias: v1(3.48,21.36) v1(4.2,21.35) v1(4.86,21.36) v1(4.9,8.73) v1(5.6,8.73) v1(6.25,21.36) v1(6.98,21.36)
1SPI_VCCIO1: length 6.8
  TOP w0.24: U5.22 v1(39.91,11.35)
  BOTTOM w0.4: FB8.2 C51.1 40.07,10.62 39.99,10.54 C50.1 C46.1 39.72,12.17 39.91,11.98 v1(39.91,11.35)
2SPI_VCCIO1: length 6.9
  TOP w0.24: U6.22 v1(56.65,11.35)
  BOTTOM w0.4: FB7.2 57.2,10.4 56.73,10.87 C49.1 C45.1 56.46,12.31 56.54,12.23 C44.1 57.13,11.55 56.93,11.35 v1(56.65,11.35)
ALL_SHUTDOWN: length 104.8
  TOP w0.157: J2.15 v1(84.8,10.57)
  TOP w0.2: v1(9.31,6.04) 9.32,6.03 R29.2
  TOP w0.4: J1.22 8.52,19.46 8.85,19.13 v1(9.25,19.13) R11.2
  BOTTOM w0.2: v1(9.25,19.13) 8.96,18.84 8.96,6.39 v1(9.31,6.04) 9.31,5.11 9.91,4.5 14.39,4.5 15.59,3.3 19.14,3.3 21.15,5.31 24.99,5.31 25.59,5.91 26.34,5.91 26.95,5.31 30.77,5.31 31.68,4.41 42.63,4.41 43.3,3.74 45.72,3.74 46.31,3.15 52.4,3.15 53.96,4.71 61.48,4.71 62.77,3.41 66.33,3.41 67.23,4.32 71.34,4.32 ; 71.34,4.32 82.31,4.32 84.8,6.81 v1(84.8,10.57) ; 71.34,4.32 71.34,4.32 ; 71.34,4.32 TP23.1 71.34,4.32
CFG_SPI_CLK: length 10.2
  TOP w0.157: U1.6 45.02,25.69 45.02,25.69 TP34.1 42.79,24.97 42.79,22.22 41.94,21.36 40.94,21.36 40.41,20.83 U5.38
CFG_SPI_CS: length 14.7
  TOP w0.157: R5.1 52.26,23.23 52.19,23.15 U1.1 v1(50.3,23.15) ; U5.37 40.91,20.61 41.18,20.89 42.37,20.89 43.34,21.86 v1(43.74,21.86)
  BOTTOM w0.157: v1(43.74,21.86) 45.69,21.86 46.2,21.35 47.02,21.35 48.83,23.15 v1(50.3,23.15)
CFG_SPI_D0: length 5
  TOP w0.157: U1.5 44.81,26.96 44.81,26.96 TP35.1 43.48,26.96 43.47,26.96 43.28,26.96 42.8,26.48 U10.15
CFG_SPI_D1: length 17.9
  TOP w0.157: v1(50.3,24.42) 50.5,24.42 50.51,24.42 U1.2 ; U10.7 v1(36.31,23.23)
  BOTTOM w0.157: v1(50.3,24.42) 46.81,24.42 45.79,25.44 43.39,25.44 42.56,24.61 41.5,24.61 40.85,25.26 39.2,25.26 37.17,23.23 v1(36.31,23.23)
CFG_SPI_D2: length 17.1
  TOP w0.157: v1(36.43,25.82) 36.42,25.83 U10.3 ; U1.3 50.29,25.69 v1(49.64,26.34)
  BOTTOM w0.157: v1(49.64,26.34) 48.9,27.09 38.71,27.09 37.45,25.82 v1(36.43,25.82)
CFG_SPI_D3: length 5
  TOP w0.157: U10.11 v1(42.17,23.88) ; v1(44.9,24.42) U1.7
  BOTTOM w0.157: v1(42.17,23.88) 43.86,23.88 44.4,24.42 v1(44.9,24.42)
DB_IO_0: length 7.8
  TOP w0.157: U10.14 40.01,25.83 38.41,24.23 U5.42
DB_IO_1: length 8.7
  TOP w0.157: U5.43 37.91,25.55 36.97,26.48 U10.2
DB_IO_2: length 5.9
  TOP w0.157: U5.44 37.41,23.37 36.89,23.88 U10.6
DB_IO_3: length 5.2
  TOP w0.157: U5.41 38.91,22.45 39.69,23.23 U10.10
DONE1_LED: length 7.9
  TOP w0.157: 34.36,15.75 v1(33.53,15.75)
  TOP w0.4: v1(34.87,10.08) R19.2
  BOTTOM w0.157: v1(33.53,15.75) 33.53,12.61 35.15,10.98 35.15,10.37 v1(34.87,10.08)
DONE2_LED: length 6.3
  TOP w0.24: U6.7 v1(50.27,15.75)
  BOTTOM w0.157: R48.2 52.68,12.4 51.51,13.57 50.73,13.57 50.27,14.03 v1(50.27,15.75)
FF1_SCK: length 16.8
  TOP w0.157: U5.15 36.41,9.69 36.17,9.45 v1(36.17,8.79)
  TOP w0.22: TP7.1 29.04,3 28.3,3.75 28.3,5.28 28.97,5.96 U8.6 31.56,5.96 31.92,6.32 R30.1 v1(33.48,6.32)
  BOTTOM w0.22: v1(36.17,8.79) 36.17,8.09 34.4,6.32 v1(33.48,6.32)
FF1_SS: length 21.6
  TOP w0.157: v1(37.22,8.75) 37.22,9.23 36.91,9.54 U5.16
  TOP w0.25: v1(37.22,8.75) 37.62,8.75 39.04,7.33 TP10.1
  TOP w0.3: U8.1 24.2,8.5 23.9,8.8 R18.1
  TOP w0.4: v1(25.71,8.5) U8.1
  BOTTOM w0.16: v1(25.71,8.5) 34.45,8.5 35.33,9.38 36.58,9.38 v1(37.22,8.75)
FF2_SCK: length 19.7
  TOP w0.157: TP12.1 51.13,3 50.44,3.7 50.44,5.68 ; 50.44,5.68 U9.6 ; 50.44,5.68 50.13,5.98 50.13,8.14 51.7,9.71 52.47,9.71
  TOP w0.16: 52.47,9.71 53.15,10.39 U6.15
  TOP w0.3: U9.6 53.93,5.68 54.12,5.49 R33.1
FF2_SS: length 21.3
  TOP w0.157: U6.16 53.65,9.93 v1(52.93,9.2)
  TOP w0.3: R21.1 45.82,8.22 45.82,8.22 U9.1 v1(48.08,8.22)
  BOTTOM w0.157: TP15.1 60.03,7.7 56.45,7.7 55.24,8.92 53.21,8.92 v1(52.93,9.2) 51.33,9.2 50.34,8.22 v1(48.08,8.22)
FL1_MISO: length 18.6
  TOP w0.22: R24.1 37.69,7.74 37.88,7.55 v1(37.88,6.98) R32.1
  TOP w0.25: R32.1 38.69,6.32 TP9.1
  TOP w0.3: v1(25.71,7.23) U8.2
  BOTTOM w0.22: v1(25.71,7.23) 31.47,7.23 33.33,5.37 v1(35.12,5.37) 36.74,6.98 v1(37.88,6.98)
FL1_MOSI: length 11
  TOP w0.22: R31.2 34.43,6.31 34.42,6.32 ; R23.2 34,6.92 34.42,6.5 34.42,6.32 ; TP8.1 33,3.99 32.59,4.4 ; 32.59,4.4 33.85,4.4 34.42,4.97 34.42,6.32 ; 32.59,4.4 31.68,4.4 31.39,4.69 U8.5
FL1_RST: length 2.6
  TOP w0.3: R22.1 31.82,7.6 31.45,7.23 U8.7
FL1_WP: length 7.1
  TOP w0.22: U8.3 26.73,5.96 27.1,5.6 27.1,3.55 26.54,3 25.51,3 25.51,3 R40.1
FL2_MISO: length 19.8
  TOP w0.3: R26.1 45.2,6.74 45.41,6.95 U9.2 v1(48.16,6.95) ; TP14.1 61,4.43 v1(59.78,5.65) R28.1
  BOTTOM w0.157: v1(48.16,6.95) 49.17,6.95 50.47,5.65 v1(59.78,5.65)
FL2_MOSI: length 16.5
  TOP w0.3: TP13.1 58,3.98 57.31,4.67 ; 57.31,4.67 R27.2 ; 57.31,4.67 57.05,4.41 U9.5 v1(51.41,4.41) ; R36.2 v1(45.36,4.95)
  BOTTOM w0.157: v1(45.36,4.95) 46.12,5.71 49.16,5.71 50.47,4.41 v1(51.41,4.41)
FL2_RST: length 2.3
  TOP w0.3: R25.1 U9.7
FL2_WP: length 6.8
  TOP w0.3: U9.3 48.76,5.68 49.5,4.93 49.5,3.63 48.71,2.84 R41.1
FP1_RST: length 37.1
  TOP w0.157: 34.36,15.25 33.44,15.25 33.44,15.25 v1(33.05,15.25)
  TOP w0.38: TP4.1 20.95,25.29 20.92,25.32 SW1.1
  BOTTOM w0.157: R43.2 20.76,23.52 20.24,23 20.24,11.44 21.58,10.09 23.28,10.09 24.25,9.12 31.03,9.12 31.61,9.7 31.61,10.92 32.67,11.98 32.67,14.87 v1(33.05,15.25)
  BOTTOM w0.25: TP4.1 21.26,24.8 R43.2
FP1_SI: length 14.2
  TOP w0.157: U5.17 37.41,9.92 38.81,8.52 39.84,8.52 40.57,7.78 40.57,5.07 39.93,4.43 38.27,4.43 37.88,4.81 R32.2
  TOP w0.22: R31.1 36.93,5.31 36.94,5.32 R32.2
FP1_SO: length 6.8
  TOP w0.157: U5.14 35.91,9.85 34.98,8.92 34.98,8.6 ; 34.98,8.6 R23.1 ; 34.98,8.6 34.98,8.07 35.32,7.74 R24.2
FP2_RST: length 34.9
  TOP w0.24: v1(49.68,15.25) 50.13,15.25 50.15,15.23 50.49,15.23 50.51,15.25 U6.8
  TOP w0.3: v1(54.21,22.37) 55.28,23.44 SW2.1
  TOP w0.4: R42.2 54.18,26.87 55.28,25.76 SW2.1 56.72,25.61 56.74,25.59 TP3.1
  BOTTOM w0.157: v1(49.68,15.25) 49.68,13.74 50.63,12.8 51.19,12.8 51.57,12.41 51.57,11.76 50.91,11.1 50.27,11.1 46.83,14.54 46.83,20.06 49.13,22.37 v1(54.21,22.37)
FP2_SI: length 8.8
  TOP w0.157: R27.1 57.31,7.17 55.54,8.95 54.68,8.95 54.15,9.47 U6.17
  TOP w0.3: R27.1 58.02,6.66 58.03,6.65 R28.2
FP2_SO: length 14.8
  TOP w0.157: v1(48.79,7.61) 49.37,8.18 49.37,8.62 51.03,10.28 51.83,10.28 52.65,11.11 U6.14
  TOP w0.3: R26.2 v1(43.7,5.83) 43.7,5.56 43.69,5.55 R36.1
  BOTTOM w0.157: v1(48.79,7.61) 44.58,7.61 43.7,6.73 v1(43.7,5.83)
IO_MUX: length 17.5
  TOP w0.157: U10.16 39.59,27.13 39.01,27.72 34.23,27.72 34.01,27.5 34.01,22.93 34.36,22.58 U10.8 36.28,22.58 36.91,21.95 U5.45
IR_5V0:
  vias: v1(72.64,20.21) v1(73.04,20.61) v1(73.52,20.27)
IR_D0: length 21.9
  TOP w0.157: v1(71.24,17.1) 69.61,17.1 66.02,20.69 62.35,20.69 60.27,22.77 55.91,22.77 54.65,21.5 U6.43
  BOTTOM w0.157: J3.13 v1(71.24,17.1)
IR_D1: length 22.2
  TOP w0.157: v1(67.53,18.07) 67.53,18.47 67.37,18.63 67.02,18.63 66.86,18.47 66.64,18.47 66.48,18.63 66.48,18.85 66.69,19.06 66.69,19.28 66.53,19.44 66.31,19.44 66.17,19.3 65.95,19.3 65.79,19.46 65.79,19.68 65.81,19.71 65.81,19.93 65.53,20.21 65.3,20.21 65.04,19.95 64.74,19.95 64.45,20.25 64.22,20.25 63.93,19.96 63.66,19.96 63.37,20.25 63.15,20.25 62.99,20.09 62.99,20.06 62.83,19.9 62.61,19.9 62.45,20.06 62.45,20.09 62.3,20.25 61.9,20.25 59.83,22.32 57.56,22.32 57.3,22.06 57.3,21.59 57.14,21.43 56.91,21.43 56.76,21.58 56.76,22.06 56.6,22.21 56.04,22.21 55.15,21.32 U6.42
  BOTTOM w0.157: J3.14 68.57,16.8 68.34,17.03 68.34,17.9 68.18,18.07 v1(67.53,18.07)
IR_D2: length 22
  TOP w0.157: U6.38 57.15,20.68 57.8,21.34 58.09,21.34 58.21,21.46 58.21,21.77 58.33,21.89 58.5,21.89 58.62,21.77 58.62,21.46 58.74,21.34 58.91,21.34 59.03,21.46 59.03,21.77 59.15,21.89 59.32,21.89 59.44,21.77 59.44,21.46 59.56,21.34 60.04,21.34 61.88,19.49 64.9,19.49 67.21,17.19 TP28.1 68.83,16.5 72.02,16.5 72.49,16.97 v1(72.93,16.97)
  BOTTOM w0.157: J3.15 72.68,16.5 72.93,16.75 v1(72.93,16.97)
IR_D3: length 22.2
  TOP w0.157: v1(67.85,16.2) 67.45,16.2 64.82,18.83 61.82,18.83 59.73,20.91 58.05,20.91 57.65,20.5 U6.37
  BOTTOM w0.157: v1(67.85,16.2) 67.11,16.2 65.28,18.03 65.28,18.34 65.67,18.73 66.07,18.73 TP20.1 66.78,18.03 66.78,17.65 67.12,17.31 67.7,17.31 67.86,17.15 67.86,16.83 68.48,16.2 J3.16
IR_D4: length 22.2
  TOP w0.157: v1(72.95,15.9) 70.71,15.9 70.54,15.74 70.26,15.74 70.01,15.98 69.7,15.98 69.37,15.65 69.2,15.65 69.08,15.78 69.08,15.95 68.96,16.07 68.67,16.07 68.2,15.6 67.44,15.6 64.79,18.26 61.26,18.26 60.78,18.74 60.32,18.74 60.15,18.9 60.15,19.6 59.34,20.41 58.46,20.41 58.31,20.26 58.31,19.45 58.46,19.3 59.37,19.3 59.54,19.12 59.54,18.9 59.38,18.74 U6.36
  BOTTOM w0.157: J3.17 v1(72.95,15.9)
IR_D5: length 22.2
  TOP w0.157: U6.35 60.3,18.24 60.85,17.69 64.64,17.69 v1(66.73,15.6)
  BOTTOM w0.157: 63.94,18.52 TP19.1 63.93,18.52 ; 63.94,18.52 64.35,18.52 64.55,18.32 64.55,17.78 v1(66.73,15.6) ; 63.94,18.52 63.93,18.52 ; J3.18 67.82,15.6 67.37,15.15 66.41,15.15 65.82,15.75 64.67,15.75 64.2,16.22 64.2,16.92 63.36,17.76 63.36,18.37 63.52,18.52 63.93,18.52
IR_D6: length 22.1
  TOP w0.157: v1(73.7,15.3) 69.76,15.3 69.46,15 66.63,15 64.41,17.22 60.44,17.22 59.93,17.74 U6.34
  BOTTOM w0.157: 73.61,13.7 TP21.1 73.6,13.7 ; 73.61,13.7 74.1,13.7 74.4,14 74.4,15.12 74.22,15.3 v1(73.7,15.3) ; 73.61,13.7 73.6,13.7 ; J3.19 72.69,15.3 72.87,15.12 72.87,13.94 73.12,13.7 73.6,13.7
IR_D7: length 22.1
  TOP w0.157: U6.32 61.21,16.74 61.58,16.37 61.58,15.89 61.69,15.78 61.89,15.78 62.04,15.93 62.04,16.58 62.2,16.74 62.51,16.74 62.65,16.6 62.65,15.87 62.76,15.76 62.99,15.76 63.15,15.91 63.15,16.58 63.3,16.74 63.58,16.74 63.7,16.61 63.7,15.89 63.86,15.73 64.02,15.73 64.19,15.9 64.19,16.25 64.3,16.36 64.52,16.36 v1(65.88,15)
  BOTTOM w0.157: 64.82,13.94 64.82,12.02 64.98,11.86 65.46,11.86 65.61,12.02 65.61,13.48 66.84,14.71 68.04,14.71 68.33,15 J3.20 ; 64.82,13.94 64.82,13.94 v1(65.88,15) ; 64.82,13.94 TP17.1
IR_D8: length 22.1
  TOP w0.157: v1(71.24,14.7) 70.15,14.7 69.98,14.53 69.31,14.53 68.95,14.17 68.31,14.17 67.95,14.53 66.09,14.53 66.08,14.53 65.47,14.53 65.47,14.52 65.25,14.75 65.25,15.01 65.11,15.14 64.92,15.14 64.82,15.04 64.82,14.65 64.69,14.52 64.5,14.52 64.34,14.68 64.34,15.18 64.19,15.34 63.99,15.34 63.86,15.21 63.86,14.22 63.71,14.06 63.55,14.06 63.39,14.22 63.39,15.21 63.25,15.35 63.03,15.35 62.88,15.19 62.88,14.33 62.76,14.22 62.54,14.22 62.26,14.5 62.26,15.2 62.1,15.36 61.79,15.36 61.63,15.2 61.63,14.96 61.4,14.73 60.74,14.73 60.51,14.96 60.51,15.14 60.62,15.26 61.01,15.26 61.22,15.47 61.22,15.97 60.96,16.24 U6.31
  BOTTOM w0.157: v1(71.24,14.7) 71.41,14.7 71.41,14.7 J3.21
IR_D9: length 22
  TOP w0.157: U6.28 60.18,14.74 60.61,14.31 61.8,14.31 62.62,13.49 v1(63.3,13.49)
  BOTTOM w0.157: 65.32,10.82 64.59,10.82 64.16,11.25 63.42,11.25 63.3,11.37 63.3,11.54 63.42,11.66 64.16,11.66 64.28,11.78 64.28,11.95 64.16,12.07 63.42,12.07 63.3,12.19 63.3,12.36 63.42,12.48 64.16,12.48 64.28,12.6 64.28,12.77 64.16,12.89 63.42,12.89 63.3,13.01 v1(63.3,13.49) ; 65.32,10.82 65.32,10.82 ; 65.32,10.82 TP18.1 65.32,10.82 ; 65.32,10.82 67.35,10.82 67.51,10.98 67.51,11.2 67.4,11.31 66.33,11.31 66.17,11.48 66.17,13.3 67.08,14.21 68.37,14.21 68.57,14.4 J3.22
IR_D10: length 22
  TOP w0.157: U6.27 59.98,14.24 60.38,13.84 61.32,13.84 61.91,13.24 61.91,11.9 62.07,11.75 62.36,11.75 62.51,11.9 62.51,12.76 62.67,12.92 63.03,12.92 63.19,12.76 63.19,11.9 63.35,11.75 64.04,11.75 64.19,11.9 64.19,12.53 64.07,12.65 63.94,12.65 63.82,12.77 63.82,12.94 63.94,13.06 64.07,13.06 64.19,13.18 64.19,13.5 64.78,14.09 67.69,14.09 68.11,13.67 68.11,13.2 68.23,13.08 68.4,13.08 68.52,13.2 68.52,13.66 68.64,13.78 68.81,13.78 68.93,13.66 68.93,13.2 69.05,13.08 69.22,13.08 69.34,13.2 69.34,13.88 69.56,14.1 v1(70.55,14.1)
  BOTTOM w0.157: J3.23 v1(70.55,14.1)
IR_D11: length 22.2
  TOP w0.157: v1(67.32,13.55) 64.87,13.55 64.76,13.45 64.76,13.31 64.92,13.15 65.5,13.15 65.66,13 65.66,12.81 65.5,12.66 64.82,12.66 64.72,12.56 64.72,12.34 64.89,12.17 65.35,12.17 65.49,12.03 65.49,11.82 65.3,11.64 65.3,11.21 65.08,10.99 64.77,10.99 64.52,11.24 62.86,11.24 62.68,11.06 62.46,11.06 62.19,11.33 61.05,11.33 60.82,11.1 60.45,11.1 60.18,11.38 60.18,11.62 60.36,11.8 61.27,11.8 61.43,11.96 61.43,12.18 61.27,12.33 60.33,12.33 60.22,12.45 60.22,12.66 60.37,12.82 61.07,12.82 61.24,12.98 61.24,13.2 61.08,13.36 60.1,13.36 59.73,13.74 U6.26
  BOTTOM w0.157: v1(67.32,13.55) 67.83,13.55 68.08,13.8 J3.24
IR_D12: length 22.1
  TOP w0.157: U6.25 59.5,13.24 59.66,13.08 59.66,12.85 59.46,12.65 58.66,12.65 58.5,12.49 58.5,12.33 58.65,12.18 59.5,12.18 59.65,12.03 59.65,11.81 59.46,11.61 58.98,11.61 58.84,11.48 58.84,11.13 59.1,10.86 60.01,10.86 60.31,10.56 61.02,10.56 61.3,10.85 61.89,10.85 62.17,10.56 62.99,10.56 63.24,10.82 64.15,10.82 64.46,10.5 65.53,10.5 65.77,10.74 65.77,11.37 66,11.61 66,12.48 66.45,12.93 67.64,12.93 68.47,12.1 68.97,12.1 70.38,13.5 v1(71.24,13.5)
  BOTTOM w0.157: J3.25 v1(71.24,13.5)
IR_D13: length 22.2
  TOP w0.157: v1(66.81,12.36) 66.5,12.05 66.5,11.85 66.59,11.75 66.85,11.75 67.01,11.59 67.01,11.31 66.85,11.15 66.4,11.15 66.25,11 66.25,10.71 66.4,10.55 67.94,10.55 68.12,10.38 68.12,10.15 68.01,10.04 59.7,10.04 59.48,10.27 58.97,10.27 58.74,10.04 58.52,10.04 58.37,10.2 58.37,11.18 58.21,11.34 57.99,11.34 57.82,11.17 57.82,10.64 57.66,10.48 57.44,10.48 57.15,10.77 U6.23
  BOTTOM w0.157: J3.26 68.29,13.2 67.45,12.36 v1(66.81,12.36)
IR_HSYNC: length 22.1
  TOP w0.157: v1(67.83,11.87) 67.52,11.55 67.52,11.33 67.73,11.11 67.96,11.11 68.32,11.48 68.53,11.48 68.72,11.29 68.72,11.07 68.51,10.86 68.51,10.64 68.67,10.48 68.83,10.48 69.34,10.99 69.57,10.99 69.68,10.88 69.68,10.58 69.27,10.17 69.09,10.17 TP30.1 68.42,9.51 57.66,9.51 56.15,11.01 U6.21
  BOTTOM w0.157: J3.28 68.57,12.6 v1(67.83,11.87)
IR_PCLK: length 22.3
  TOP w0.157: U6.19 55.15,10.67 57.35,8.48 69.48,8.48 TP27.1 70.68,9.68 70.68,12.15 70.84,12.3 v1(71.24,12.3)
  BOTTOM w0.157: J3.29 v1(71.24,12.3)
IR_RESERVED1: length 30.7
  TOP w0.157: v1(81.49,19.46) 81.49,19.46 J2.3 ; U6.40 v1(56.15,21.5)
  BOTTOM w0.157: v1(81.49,19.46) 80.47,19.46 78.75,21.18 74.8,21.18 72.88,23.11 65.86,23.11 65.18,22.43 57.08,22.43 v1(56.15,21.5)
IR_RESERVED2: length 30
  TOP w0.157: U6.39 v1(56.65,20.59) ; J2.4 v1(81.5,18.19)
  BOTTOM w0.157: v1(56.65,20.59) 56.65,20.99 57.56,21.91 65.48,21.91 66.15,22.57 72.51,22.57 74.43,20.66 78.57,20.66 81.04,18.19 v1(81.5,18.19)
IR_SHUTDOWN: length 35.8
  TOP w0.157: v1(70.56,7.52) 69.59,7.52 69.23,7.87 57.27,7.87 55.59,9.55 55.07,9.55 54.65,9.96 U6.18
  BOTTOM w0.157: 76.06,16.59 TP22.1 76.03,16.59 ; 76.06,16.59 v1(78.93,16.59) ; 76.06,16.59 76.03,16.59 ; v1(70.56,7.52) 72.48,7.52 72.88,7.91 72.88,12.36 73.19,12.68 74.6,12.68 74.9,12.98 74.9,16.19 75.3,16.59 76.03,16.59
IR_UART_RX: length 46.3
  TOP w0.157: v1(70.2,25.16) 70.62,24.74 R49.1 ; U10.1 v1(36.36,27.13) ; v1(60.8,27.25) 62.08,25.97 65.69,25.97 v1(66.92,24.74) 66.92,21.09 67.63,20.38 69.41,20.38 69.89,19.89 v1(69.89,19.2)
  BOTTOM w0.157: v1(36.36,27.13) 37.64,27.13 38.1,27.59 51.14,27.59 51.68,27.05 55.64,27.05 56.13,27.54 58.98,27.54 59.26,27.25 v1(60.8,27.25) ; v1(66.92,24.74) 68.15,24.74 68.57,25.16 v1(70.2,25.16) ; J3.6 v1(69.89,19.2)
IR_UART_TX: length 42.8
  TOP w0.157: U10.13 v1(42.18,25.18) ; v1(71.25,18.9) 70.83,19.33 70.83,20.13 70.07,20.89 68.04,20.89 67.67,21.26 67.67,25.55 v1(67.28,25.94) 66.6,26.62 v1(62.53,26.62) ; v1(70.26,26.13) R50.1
  BOTTOM w0.157: v1(67.28,25.94) 68.08,25.94 68.27,26.13 v1(70.26,26.13) ; v1(71.25,18.9) J3.7 ; v1(42.18,25.18) 42.97,25.97 46.42,25.97 47.27,25.12 55.86,25.12 56.73,24.25 59.16,24.25 60.02,25.12 61.04,25.12 v1(62.53,26.62)
IR_UPLD_DONE: length 34.4
  TOP w0.157: U6.41 v1(55.65,20.62) ; J2.2 v1(81.5,20.73)
  BOTTOM w0.157: v1(55.65,20.62) 55.65,21.03 55.52,21.15 55.52,21.82 56.64,22.94 61.61,22.94 62.17,23.5 62.17,24.45 63.71,25.99 65.15,25.99 TP26.1 65.92,25.22 65.92,24.6 66.97,23.56 73.54,23.56 75.37,21.72 79.24,21.72 80.23,20.73 v1(81.5,20.73)
IR_VSYNC: length 21.8
  TOP w0.157: v1(70.56,12.9) 70.12,12.47 70.12,12.24 69.97,12.09 69.97,12.02 TP29.1 69.76,11.76 70.12,11.39 70.12,10.16 68.96,9 57.48,9 55.64,10.83 55.64,11.46 55.65,11.47 U6.20
  BOTTOM w0.157: J3.27 v1(70.56,12.9)
LED1: length 10.6
  TOP w0.157: v1(39.93,21.09) 39.93,20.63 39.91,20.6 U5.39
  BOTTOM w0.157: v1(39.93,21.09) 39.65,21.37 37,21.37 34.77,23.6 34.77,25.04 34.1,25.71 R53.1
LED2: length 13.8
  TOP w0.157: v1(39.41,20.62) U5.40
  BOTTOM w0.157: v1(39.41,20.62) 36.65,20.62 34.44,22.83 30.88,22.83 30.41,22.36 R54.1
MCU_UART_RX: length 17.5
  TOP w0.157: J2.24 85.77,22 85.25,22.52 85.25,24.03 82.6,26.68 73.78,26.68 73.22,26.13 R50.2
MCU_UART_TX: length 16.2
  TOP w0.157: J2.1 83.73,22 84.13,22.4 84.13,24.16 82.58,25.7 74.03,25.7 73.07,24.74 R49.2
PSRAM_ADQ0: length 14.4
  TOP w0.157: 34.36,14.75 33.15,14.75 33.05,14.65 32.8,14.65 32.67,14.78 32.42,14.78 32.27,14.63 32.27,14.46 32.44,14.3 32.44,14.05 32.32,13.94 32.16,13.94 31.97,14.14 31.79,14.14 31.66,14.01 31.66,13.83 32.03,13.46 32.03,13.26 31.89,13.12 31.71,13.12 31.23,13.6 31.06,13.6 30.83,13.37 30.83,13.19 30.97,13.05 31.23,13.05 31.32,12.96 31.32,12.83 31.23,12.74 29.96,12.74 29.87,12.83 29.87,13.02 29.74,13.15 29.45,13.15 29.13,12.83 27.09,12.83 26.74,13.18 26.74,14.46 U4.D3
PSRAM_ADQ1: length 14.3
  TOP w0.157: 34.36,13.75 33.42,13.75 33.18,13.51 33.18,12.79 33.62,12.34 33.62,11.98 33.38,11.73 26.51,11.73 25.33,12.91 25.33,13.29 25.72,13.68 25.72,14.48 U4.D2
PSRAM_ADQ2: length 14.3
  TOP w0.157: U4.C4 27.71,15.49 28.83,15.49 29.86,16.52 29.86,16.81 30.12,17.07 30.7,17.07 30.83,17.2 30.83,17.45 30.7,17.58 30.12,17.58 29.99,17.71 29.99,18.69 30.12,18.82 30.54,18.82 30.67,18.69 30.67,18.2 30.84,18.03 31.08,18.03 31.25,18.2 31.25,19.2 31.38,19.33 32.03,19.33 32.16,19.2 32.16,18.09 32.29,17.96 32.79,17.96 33,17.75 34.36,17.75
PSRAM_ADQ3: length 14.5
  TOP w0.157: 34.36,16.25 33.07,16.25 32.92,16.4 32.92,16.58 32.8,16.7 32.65,16.7 32.4,16.45 32.4,16.27 32.78,15.9 32.78,15.72 32.62,15.56 32.4,15.56 32.11,15.85 31.89,15.85 31.74,15.69 31.74,15.47 31.99,15.21 31.99,14.99 31.83,14.82 31.6,14.82 31.44,14.99 31.22,14.99 31.02,14.79 31.02,14.57 31.19,14.4 31.19,14.18 31.06,14.05 30.79,14.05 30.66,14.18 30.66,14.31 30.54,14.43 30.37,14.43 30.24,14.3 30.24,13.96 30.25,13.98 30.32,13.91 30.32,13.69 30.17,13.53 29.95,13.53 29.79,13.69 29.79,14.05 29.67,14.17 29.49,14.17 29.4,14.08 29.4,13.82 28.81,13.23 28.31,13.23 27.75,13.79 27.75,14.45 U4.D4
PSRAM_ADQ4: length 14.4
  TOP w0.157: 34.36,17.25 32.32,17.25 32.03,17.54 32.03,17.54 31.69,17.88 31.51,17.88 31.38,17.75 31.38,17.58 32.06,16.9 32.06,16.72 31.97,16.63 31.79,16.63 31.72,16.7 31.72,16.7 31.58,16.84 31.4,16.84 31.35,16.79 31.35,16.65 31.47,16.54 31.47,16.31 31.31,16.16 31.09,16.16 30.71,16.54 30.49,16.54 30.38,16.43 30.38,16.19 30.86,15.71 30.86,15.33 30.63,15.11 30.33,15.11 30.21,15.23 30.21,15.77 30.08,15.89 29.9,15.89 29.77,15.77 29.77,14.77 29.65,14.64 29.47,14.64 29.34,14.77 29.34,15.04 29.21,15.17 29.02,15.17 28.92,15.07 28.92,14.63 28.79,14.5 28.33,14.5 28.23,14.6 U4.D5
PSRAM_ADQ5: length 14.3
  TOP w0.157: U4.E3 26.23,13.6 25.88,13.25 25.88,13.04 26.04,12.88 26.29,12.88 26.41,12.75 26.41,12.46 26.61,12.27 26.79,12.27 26.98,12.45 27.3,12.45 27.6,12.15 27.82,12.15 28.11,12.44 28.45,12.44 28.72,12.17 28.95,12.17 29.25,12.47 29.48,12.47 29.83,12.12 30.17,12.12 30.4,12.35 30.7,12.35 30.95,12.1 31.17,12.1 31.42,12.34 31.8,12.34 32.04,12.1 32.82,12.1 32.99,12.27 32.99,12.42 32.86,12.55 32.27,12.55 32.15,12.67 32.15,12.85 32.3,13 32.59,13 32.76,13.17 32.76,13.82 33.19,14.25 34.36,14.25
PSRAM_ADQ6: length 14.4
  TOP w0.157: U4.E2 24.85,13.59 24.85,12.59 26.05,11.39 26.35,11.39 26.36,11.37 33.79,11.37 34.05,11.64 34.05,12.14 34.18,12.27 34.33,12.27 34.46,12.4 34.46,12.58 34.33,12.71 33.83,12.71 33.72,12.82 33.72,13.12 33.85,13.25 34.36,13.25
PSRAM_ADQ7: length 14.2
  TOP w0.157: U5.13 35.41,11.48 34.97,11.04 ; U4.E1 24.23,12.41 25.61,11.03 26.2,11.03 26.21,11.02 33.93,11.02 33.95,11.03 34.96,11.03 34.97,11.04 ; TP33.1 34.97,11.04
PSRAM_CE: length 15.3
  TOP w0.157: U5.46 36.41,20.97 35.65,21.73 27.93,21.73 TP32.1 26.23,20.03 v1(26.23,19.2) U4.A3
  BOTTOM w0.4: v1(26.23,19.2) R44.1
